# EAGLE board IOTLabor_R1 (EAGLE 9.6.2)
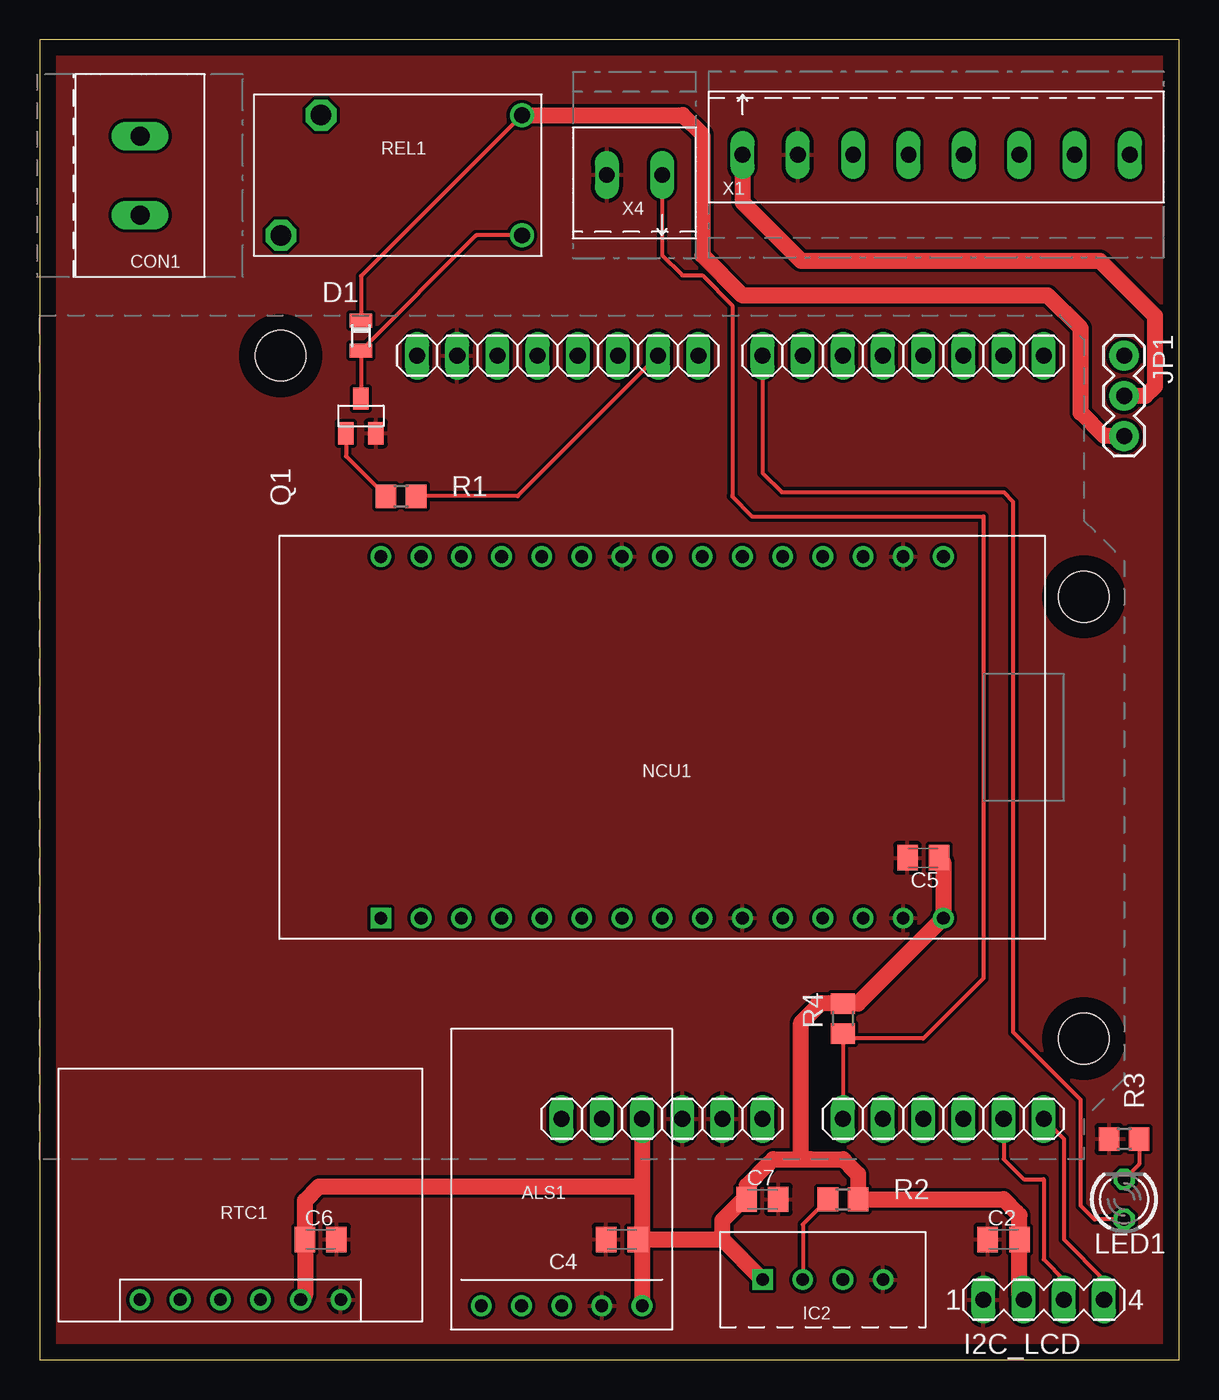
[diagram p0: board, top side]
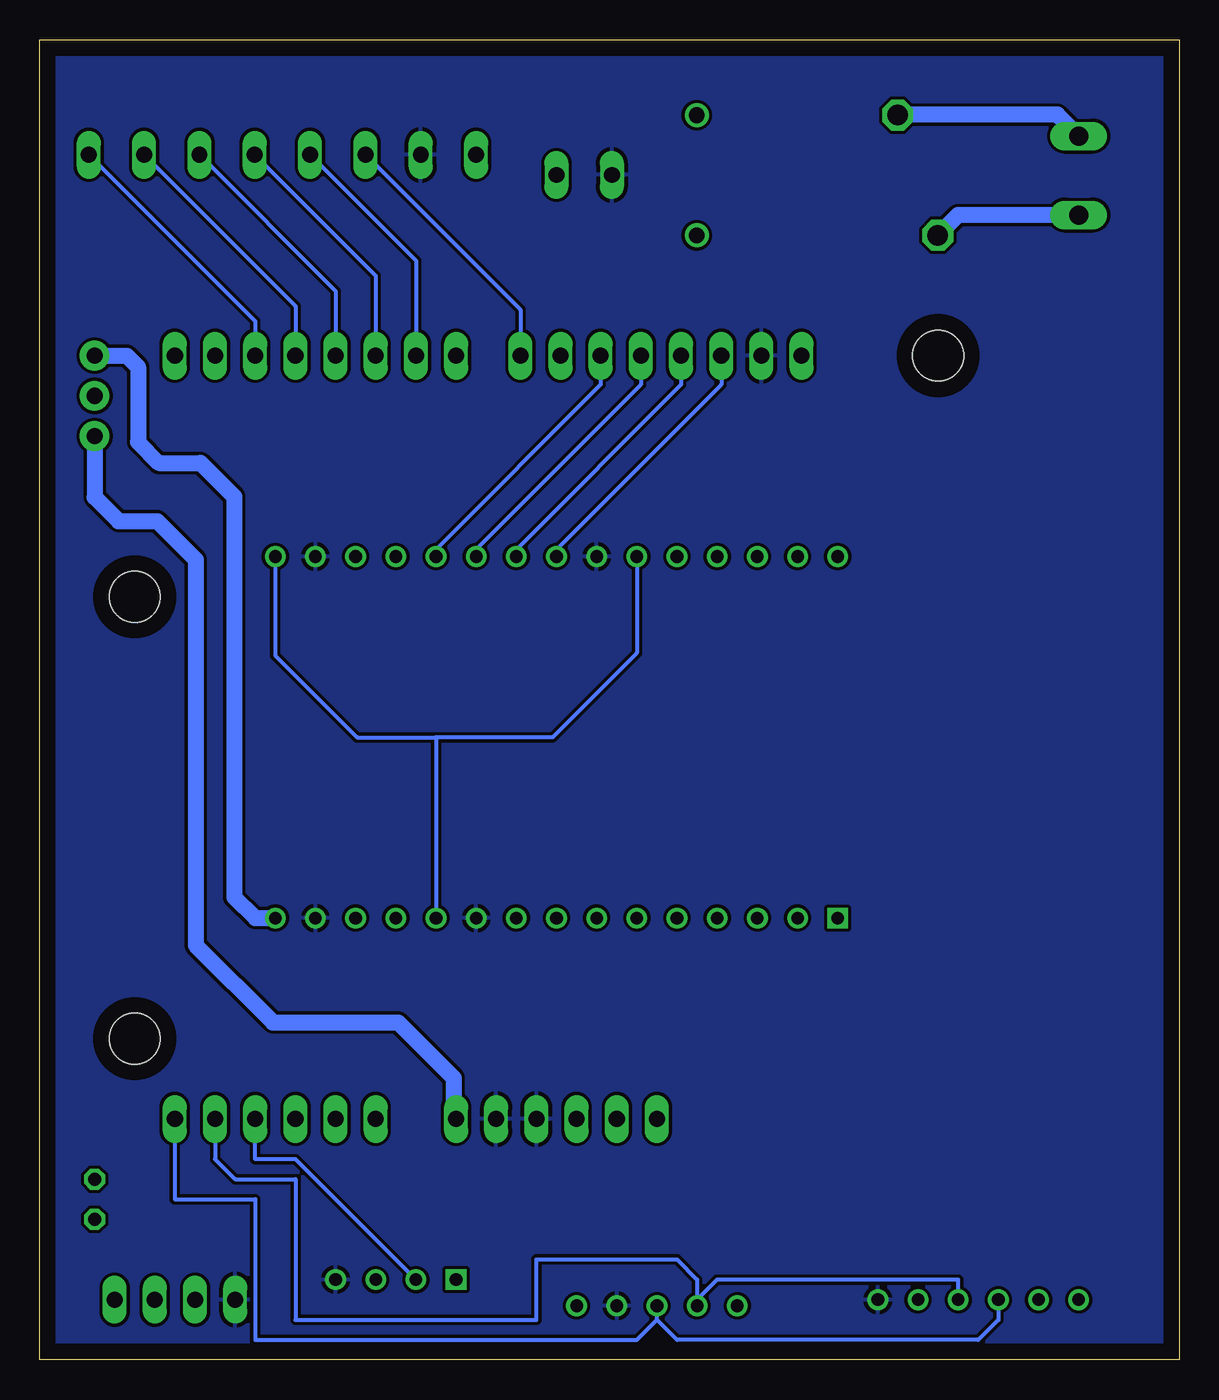
[diagram p1: board, bottom side, seen from below]

Size 72.06 x 83.49 mm. Coordinates in mm from the lower left corner, seen from the top.
Outline: 0,0 72.06,0 72.06,83.49 0,83.49 0,0
Copper layers (1*16): Top 0.035mm / dielectric 1.5mm / Bottom 0.035mm
Design rules "default": minimum track width 10mil, minimum drill 24mil, track to track 8mil, track to pad 8mil, pad to pad 8mil, via to via 8mil, smd to smd 8mil, copper to edge 40mil, drill to drill 8mil, minimum pad ring 10mil, minimum via ring 8mil, stop-mask expansion 4mil, vias tented up to drill 0mil, thermal gap 10mil

## Footprints (pad centres in the part's own frame; a part is rotated, then mirrored left to right if it is on the bottom)
TSL2561 = drill 0.8: 1 -8,5.08; 2 -8,2.54; 3 -8,0; 4 -8,-2.54; 5 -8,-5.08
C0805K = smd 1.3 x 1.6: 1 -1,0; 2 1,0
2EDGVC-5.0-02P = drill 1.2 long: 1 -2.54,0; 2 2.46,0
MICROMELF-W = smd 0.9 x 1.4: A 0.95,0; C -0.95,0
MA04-1 = drill 1.016 long: 1 -3.81,0; 2 -1.27,0; 3 1.27,0; 4 3.81,0
DHT11V = drill 0.8 square: 1 -3.81,0 | drill 0.8: 2 -1.27,0; 3 1.27,0; 4 3.81,0
ARDUINO2009 = drill 1.016 long: 1 33.02,2.54; 2 35.56,2.54; 3 38.1,2.54; 4 40.64,2.54; 5 43.18,2.54; 6 45.72,2.54; 7 50.8,2.54; 8 53.34,2.54; 9 55.88,2.54; 10 58.42,2.54; 11 60.96,2.54; 12 63.5,2.54; 13 63.5,50.8; 14 60.96,50.8; 15 58.42,50.8; 16 55.88,50.8; 17 53.34,50.8; 18 50.8,50.8; 19 48.26,50.8; 20 45.72,50.8; 21 41.656,50.8; 22 39.116,50.8; 23 36.576,50.8; 24 34.036,50.8; 25 31.496,50.8; 26 28.956,50.8; 27 26.416,50.8; 28 23.876,50.8 | hole 3.2: 15.24,50.8; 66.04,35.56; 66.04,7.62
1X03 = drill 1.016 pad 1.88: 1 0,0; 2 2.54,0; 3 5.08,0
LED3MM = drill 0.813 octagon: A -1.27,0; K 1.27,0
NODEMCU8266 = drill 0.8 square: 1 -11.43,17.78 | drill 0.8: 2 -11.43,15.24; 3 -11.43,12.7; 4 -11.43,10.16; 5 -11.43,7.62; 6 -11.43,5.08; 7 -11.43,2.54; 8 -11.43,0; 9 -11.43,-2.54; 10 -11.43,-5.08; 11 -11.43,-7.62; 12 -11.43,-10.16; 13 -11.43,-12.7; 14 -11.43,-15.24; 15 -11.43,-17.78; 16 11.43,-17.78; 17 11.43,-15.24; 18 11.43,-12.7; 19 11.43,-10.16; 20 11.43,-7.62; 21 11.43,-5.08; 22 11.43,-2.54; 23 11.43,0; 24 11.43,2.54; 25 11.43,5.08; 26 11.43,7.62; 27 11.43,10.16; 28 11.43,12.7; 29 11.43,15.24; 30 11.43,17.78
SOT23-BEC = smd 1 x 1.4: B -0.95,-1.1; C 0,1.1; E 0.95,-1.1
R0805 = smd 1.3 x 1.5: 1 -0.95,0; 2 0.95,0
0J-SS-112 = drill 1: 1 -7.64,-3.78; 4 -7.64,3.82 | drill 1.3 octagon: 2 5.06,-3.78; 3 7.6,3.82
RTC = drill 0.8: 1 -7.62,6.35; 2 -7.62,3.81; 3 -7.62,1.27; 4 -7.62,-1.27; 5 -7.62,-3.81; 6 -7.62,-6.35
15EDGVC-3.5-08P = drill 1 long: 1 -12.7,0; 2 -9.2,0; 3 -5.7,0; 4 -2.2,0; 5 1.3,0; 6 4.8,0; 7 8.3,0; 8 11.8,0
15EDGVC-3.5-02P = drill 1 long: 1 -1.27,0; 2 2.23,0

## Placement (x,y rotation side)
ALS1  TSL2561  [TSL2561]  33.02,11.43 90 top
C2  [C0805K]  60.96,7.62 0 top
C4  [C0805K]  36.83,7.62 180 top
C5  [C0805K]  55.88,31.75 180 top
C6  [C0805K]  17.78,7.62 180 top
C7  [C0805K]  45.72,10.16 0 top
CON1  2EDGVC-5.0-02P  [2EDGVC-5.0-02P]  6.35,74.93 90 top
D1  [MICROMELF-W]  20.32,64.77 270 top
I2C_LCD  [MA04-1]  63.5,3.81 0 top
IC2  DHT11V  [DHT11V]  49.53,5.08 0 top
IC3  [ARDUINO2009]  0,12.7 0 top
JP1  JUMPER-3PTH  [1X03]  68.58,63.5 270 top
LED1  IR  [LED3MM]  68.58,10.16 90 top
NCU1  NODEMCU8266  [NODEMCU8266]  39.37,39.37 90 top
Q1  BC817-25SMD  [SOT23-BEC]  20.32,59.69 0 top
R1  [R0805]  22.86,54.61 180 top
R2  [R0805]  50.8,10.16 180 top
R3  [R0805]  68.58,13.97 0 top
R4  [R0805]  50.8,21.59 90 top
REL1  0J-SS-112  [0J-SS-112]  22.86,74.93 180 top
RTC1  RTC_DS3231  [RTC]  12.7,11.43 90 top
X1  15EDG-8PV  [15EDGVC-3.5-08P]  57.15,76.2 0 top
X4  15EDG-2PV  [15EDGVC-3.5-02P]  38.1,74.93 180 top

## Library data of the parts
ALS1 IC3 RTC1 = IOTLabor2021
C2 C4-C7 R1-R4 = rcl
CON1 IC2 Q1 REL1 X1 X4 = util_
D1 = diode
I2C_LCD = con-lstb
JP1 = SparkFun
LED1 = led
NCU1 = NodeMCU

## Nets
3.3V: NCU1.11 NCU1.16 NCU1.25
+3V3: IC3.2
+5V: ALS1.5 C2.2 C4.1 C5.1 C6.2 C7.1 I2C_LCD.2 IC2.1 IC3.3 JP1.1 NCU1.15 R2.1 R4.2 RTC1.5
DHT11: IC2.2 IC3.10 R2.2
GND: ALS1.4 C2.1 C4.2 C5.2 C6.1 C7.2 I2C_LCD.1 IC2.4 IC3.4 IC3.5 IC3.27 NCU1.10 NCU1.14 NCU1.17 NCU1.24 Q1.E R3.1 RTC1.6 X1.2 X4.2
I2C_SCL: ALS1.3 I2C_LCD.4 IC3.12 RTC1.3
I2C_SDA: ALS1.2 I2C_LCD.3 IC3.11 RTC1.4
N$1: CON1.1 REL1.3
N$2: CON1.2 REL1.2
N$3: IC3.20 LED1.A
N$4: D1.A Q1.C REL1.4
N$5: Q1.B R1.2
N$6: LED1.K R3.2
N$8: JP1.2 X1.1
RLY: IC3.22 R1.1
SPI_CS: IC3.23 NCU1.20
SPI_MISO: IC3.25 NCU1.22
SPI_MOSI: IC3.24 NCU1.21
SPI_SCLK: IC3.26 NCU1.23
STP_A: IC3.15 X1.8
STP_B: IC3.16 X1.7
STP_C: IC3.17 X1.6
STP_D: IC3.18 X1.5
STP_DWN: IC3.21 X1.3
STP_UP: IC3.19 X1.4
SW: IC3.7 R4.1 X4.1
V+: D1.C IC3.6 JP1.3 REL1.1

## Tracks (layer width: path | path; a pad name or v marks a point on that pad's centre or on a via)
3.3V
  Bottom 0.254: NCU1.16 57.15,44.55 51.97,39.37 46.99,39.37 | 46.99,39.37 NCU1.11 | NCU1.25 34.29,44.7 39.62,39.37 46.99,39.37
+5V
  Top 0.254: R4.2 49.38,22.54 49.21,22.54 48.26,21.59 48.26,12.7 | 48.77,12.7 48.26,12.7 | 50.95,12.55 51.26,12.24 | I2C_LCD.2 62.23,7.35 C2.2 61.96,7.92 61.96,9.16 61.77,9.35 | C4.1 37.83,10.97 37.83,14.97 IC3.3 | 44.72,11.04 44.72,10.36 C7.1 43.18,8.62 43.18,7.62 | 46.1,12.42 46.38,12.7 | 48.26,12.7 48.16,12.7
  Top 1.016: 37.83,10.97 17.68,10.97 16.78,10.07 C6.2 16.78,4.08 RTC1.5 | 38.1,7.35 C4.1 43.18,7.62 | 38.1,7.35 ALS1.5 | IC3.3 38.1,7.35 | C5.1 57.15,31.48 NCU1.15 51.75,22.54 R4.2 49.21,22.54 | I2C_LCD.2 61.96,4.08 61.96,7.92 | 61.77,9.35 60.96,10.16 R2.1 51.75,11.75 51.26,12.24 | C2.2 61.96,9.16 | 43.18,7.62 43.18,8.82 44.72,10.36 | C7.1 44.72,11.04 46.1,12.42 | 46.38,12.7 48.16,12.7 | 48.16,12.7 48.77,12.7 50.8,12.7 50.95,12.55 | 48.16,12.7 48.16,21.32 49.38,22.54 | IC2.1 43.18,7.62
  Bottom 1.016: JP1.1 66.55,63.5 65.84,62.79 65.84,58.04 64.52,56.72 61.88,56.72 59.74,54.58 59.74,29.26 58.42,27.94 NCU1.15
DHT11
  Top 0.254: R2.2 48.26,8.57 IC2.2
  Bottom 0.254: IC2.2 55.88,12.7 58.42,12.7 IC3.10
GND
  pour Bottom: 0,83.52 71.93,83.52 71.93,0 0,0
  pour Top: 0,83.52 0,0 71.93,0 71.93,83.52
I2C_SCL
  Top 0.254: IC3.12 64.77,13.97 64.77,7.62 67.31,5.08 I2C_LCD.4
  Bottom 0.254: IC3.12 63.5,10.16 58.42,10.16 58.42,1.27 34.29,1.27 33.02,2.54 | RTC1.3 11.43,2.54 12.7,1.27 31.75,1.27 33.02,2.54 | 33.02,2.54 ALS1.3
I2C_SDA
  Top 0.254: IC3.11 60.96,12.7 62.23,11.43 63.5,11.43 63.5,6.35 64.77,5.08 I2C_LCD.3
  Bottom 0.254: IC3.11 60.96,12.7 59.69,11.43 55.88,11.43 55.88,2.54 40.64,2.54 40.64,6.35 31.75,6.35 30.48,5.08 30.48,3.81 | 30.48,3.81 ALS1.2 | RTC1.4 13.97,5.08 29.21,5.08 30.48,3.81
N$1
  Bottom 1.016: CON1.1 13.98,72.39 REL1.3
N$2
  Bottom 1.016: CON1.2 7.7,78.74 17.78,78.74 REL1.2
N$3
  Top 0.254: IC3.20 45.72,56.08 46.94,54.86 60.96,54.86 61.57,54.25 61.57,20.73 65.84,16.46 65.84,9.75 66.7,8.89 LED1.A
N$4
  Top 0.254: REL1.4 27.61,71.11 D1.A Q1.C
N$5
  Top 0.254: Q1.B 19.37,57.15 R1.2
N$6
  Top 0.254: R3.2 69.53,12.38 LED1.K
N$8
  Top 1.016: X1.1 44.45,73.2 48.16,69.49 67.06,69.49 70.54,66.01 70.54,61.57 69.93,60.96 JP1.2
RLY
  Top 0.254: IC3.22 30.23,54.61 R1.1
SPI_CS
  Bottom 0.254: IC3.23 36.58,61.67 46.99,51.26 NCU1.20
SPI_MISO
  Bottom 0.254: IC3.25 31.5,61.67 41.91,51.26 NCU1.22
SPI_MOSI
  Bottom 0.254: IC3.24 34.04,61.67 44.45,51.26 NCU1.21
SPI_SCLK
  Bottom 0.254: IC3.26 28.96,61.67 39.37,51.26 NCU1.23
STP_A
  Bottom 0.254: X1.8 58.42,65.67 IC3.15
STP_B
  Bottom 0.254: X1.7 55.88,66.63 IC3.16
STP_C
  Bottom 0.254: X1.6 53.34,67.59 IC3.17
STP_D
  Bottom 0.254: X1.5 50.8,68.55 IC3.18
STP_DWN
  Bottom 0.254: X1.3 41.66,66.41 IC3.21
STP_UP
  Bottom 0.254: X1.4 48.26,69.51 IC3.19
SW
  Top 0.254: R4.1 50.8,20.32 | 50.8,20.32 IC3.7 | X4.1 39.37,69.85 40.64,68.58 41.91,68.58 43.81,66.67 43.81,54.63 43.79,54.61 45.06,53.34 59.69,53.34 59.69,24.13 55.88,20.32 50.8,20.32
V+
  Top 0.254: REL1.1 20.32,68.53 D1.C
  Top 1.016: REL1.1 40.67,78.71 41.91,77.47 41.91,69.85 44.45,67.31 63.75,67.31 65.84,65.23 65.84,59.89 67.31,58.42 JP1.3
  Bottom 1.016: JP1.3 68.58,54.56 67.06,53.03 64.62,53.03 62.18,50.6 62.18,26.21 57.3,21.34 49.38,21.34 45.87,17.83 45.87,15.39 IC3.6